# EAGLE board controller (EAGLE 9.6.1)
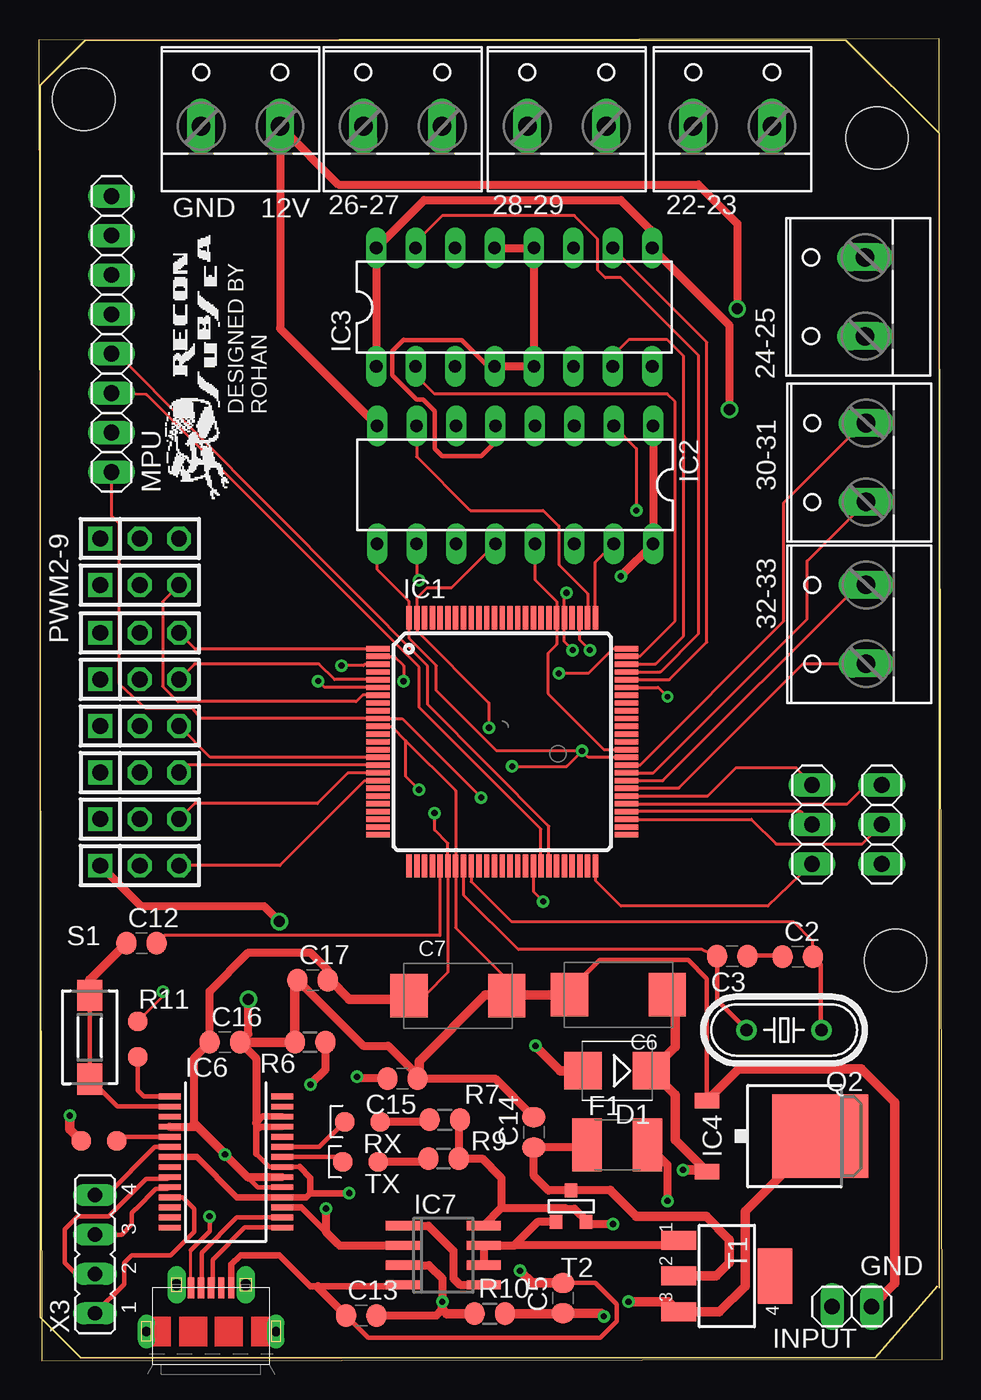
[diagram p0: board, top side]
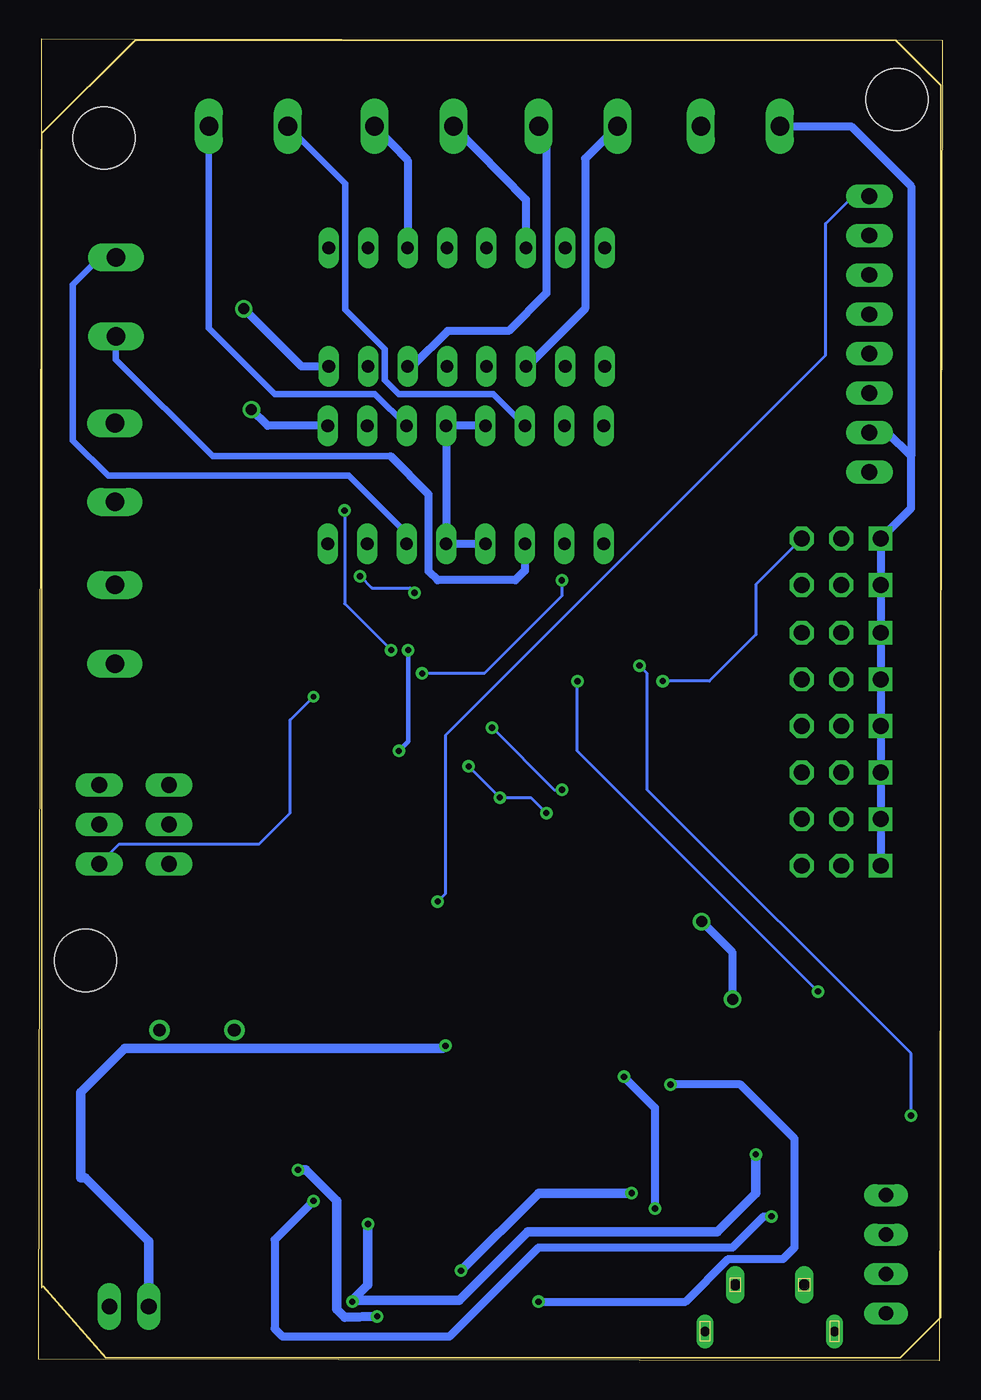
[diagram p1: board, bottom side, seen from below]

Size 58.2 x 85.2 mm. Coordinates in mm from the lower left corner, seen from the top.
Outline: 57.9,4.8 53.9,0.2 2.7,0.2 0.1,2.8 0.1,82.2 3,85.1 52,85.1 58,79.1 58,4.7
Outline: 0.2,0 58.2,0.1 58,85.2 0,85.1 0.2,0
Copper layers (1*16): Top 0.035mm / dielectric 1.5mm / Bottom 0.035mm
Design rules "default": minimum track width 6mil, minimum drill 0.35mm, track to track 6mil, track to pad 6mil, pad to pad 6mil, via to via 6mil, smd to smd 6mil, copper to edge 40mil, drill to drill 6mil, minimum pad ring 10mil, minimum via ring 8mil, stop-mask expansion 4mil, vias tented up to drill 0mil, thermal gap 10mil
Net classes: 0 default: width 0.203 mm, drill 0.406 mm, clearance 0.203 mm; 1 power: width 0.61 mm, drill 0.711 mm, clearance 0.203 mm; 2 gnd: width 0.305 mm, drill 0.711 mm, clearance 0.203 mm; 3 usbvcc: width 0.508 mm, drill 0.711 mm, clearance 0.203 mm
Holes 4 mm at 54,78.8 2.9,81.3 55.2,25.8

## Footprints (pad centres in the part's own frame; a part is rotated, then mirrored left to right if it is on the bottom)
W237-132 = drill 1.194 long: 1 -2.54,-0.635; 2 2.54,-0.635
1X03 = drill 1.016 long: 1 -2.54,0; 2 0,0; 3 2.54,0
C0805RND = smd 1.3 x 1.5: 1 -0.977,0; 2 0.977,0
SMC_D = smd 2.4 x 2.8: + -3.15,0; - 3.15,0
SMB = smd 2.4 x 2.4: A 2.2,0; C -2.2,0
L1812 = smd 1.9 x 3.4: 1 -1.95,0; 2 1.95,0
TQFP100 = smd 1.5 x 0.35: 1 -8,6; 2 -8,5.5; 3 -8,5; 4 -8,4.5; 5 -8,4; 6 -8,3.5; 7 -8,3; 8 -8,2.5; 9 -8,2; 10 -8,1.5; 11 -8,1; 12 -8,0.5; 13 -8,0; 14 -8,-0.5; 15 -8,-1; 16 -8,-1.5; 17 -8,-2; 18 -8,-2.5; 19 -8,-3; 20 -8,-3.5; 21 -8,-4; 22 -8,-4.5; 23 -8,-5; 24 -8,-5.5; 25 -8,-6; 51 8,-6; 52 8,-5.5; 53 8,-5; 54 8,-4.5; 55 8,-4; 56 8,-3.5; 57 8,-3; 58 8,-2.5; 59 8,-2; 60 8,-1.5; 61 8,-1; 62 8,-0.5; 63 8,0; 64 8,0.5; 65 8,1; 66 8,1.5; 67 8,2; 68 8,2.5; 69 8,3; 70 8,3.5; 71 8,4; 72 8,4.5; 73 8,5; 74 8,5.5; 75 8,6 | smd 0.35 x 1.5: 26 -6,-8; 27 -5.5,-8; 28 -5,-8; 29 -4.5,-8; 30 -4,-8; 31 -3.5,-8; 32 -3,-8; 33 -2.5,-8; 34 -2,-8; 35 -1.5,-8; 36 -1,-8; 37 -0.5,-8; 38 0,-8; 39 0.5,-8; 40 1,-8; 41 1.5,-8; 42 2,-8; 43 2.5,-8; 44 3,-8; 45 3.5,-8; 46 4,-8; 47 4.5,-8; 48 5,-8; 49 5.5,-8; 50 6,-8; 76 6,8; 77 5.5,8; 78 5,8; 79 4.5,8; 80 4,8; 81 3.5,8; 82 3,8; 83 2.5,8; 84 2,8; 85 1.5,8; 86 1,8; 87 0.5,8; 88 0,8; 89 -0.5,8; 90 -1,8; 91 -1.5,8; 92 -2,8; 93 -2.5,8; 94 -3,8; 95 -3.5,8; 96 -4,8; 97 -4.5,8; 98 -5,8; 99 -5.5,8; 100 -6,8
DIL16 = drill 0.813 long: 1 -8.89,-3.81; 2 -6.35,-3.81; 3 -3.81,-3.81; 4 -1.27,-3.81; 5 1.27,-3.81; 6 3.81,-3.81; 7 6.35,-3.81; 8 8.89,-3.81; 9 8.89,3.81; 10 6.35,3.81; 11 3.81,3.81; 12 1.27,3.81; 13 -1.27,3.81; 14 -3.81,3.81; 15 -6.35,3.81; 16 -8.89,3.81
DPACK = smd 1 x 1.6: 1 -2.28,-4.8; 3 2.28,-4.8 | smd 5.4 x 6.2: 2 0,2.5
SSOP28 = smd 0.381 x 1.499: 1 -4.225,-3.625; 2 -3.575,-3.625; 3 -2.925,-3.625; 4 -2.275,-3.625; 5 -1.625,-3.625; 6 -0.975,-3.625; 7 -0.325,-3.625; 8 0.325,-3.625; 9 0.975,-3.625; 10 1.625,-3.625; 11 2.275,-3.625; 12 2.925,-3.625; 13 3.575,-3.625; 14 4.225,-3.625; 15 4.225,3.625; 16 3.575,3.625; 17 2.925,3.625; 18 2.275,3.625; 19 1.625,3.625; 20 0.975,3.625; 21 0.325,3.625; 22 -0.325,3.625; 23 -0.975,3.625; 24 -1.625,3.625; 25 -2.275,3.625; 26 -2.925,3.625; 27 -3.575,3.625; 28 -4.225,3.625
SO08 = smd 0.6 x 2.2: 1 -1.905,-2.6; 2 -0.635,-2.6; 3 0.635,-2.6; 4 1.905,-2.6; 5 1.905,2.6; 6 0.635,2.6; 7 -0.635,2.6; 8 -1.905,2.6
1X02 = drill 1.016 long: 1 -1.27,0; 2 1.27,0
1X08 = drill 1.016 long: 1 -8.89,0; 2 -6.35,0; 3 -3.81,0; 4 -1.27,0; 5 1.27,0; 6 3.81,0; 7 6.35,0; 8 8.89,0
1X03' = drill 1.016 square: 1 -2.54,0 | drill 1.016 octagon: 2 0,0; 3 2.54,0
HC49/S = drill 0.813: 1 -2.413,0; 2 2.413,0
R0805RND = smd 1.3 x 1.5: 1 -0.977,0; 2 0.977,0
RCL_0805RND = smd 1.27 x 1.27: P$1 -1.143,0; P$2 1.143,0
0805RND = smd 1.27 x 1.27: P$1 -1.143,0; P$2 1.143,0
DTSM-3 = smd 2 x 1.6: 1 -2.7,0; 2 2.7,0
SOT223 = smd 1.219 x 2.235: 1 -2.311,-3.099; 2 0,-3.099; 3 2.311,-3.099 | smd 3.6 x 2.2: 4 0,3.099
SOT-23 = smd 0.787 x 0.889: 1 0.025,-1.016; 2 -0.94,1.016; 3 0.991,1.016
47589-0001 = smd 1.35 x 0.4: 1 2.8,1.3; 2 2.8,0.65; 3 2.8,0; 4 2.8,-0.65; 5 2.8,-1.3 | drill 0.6 pad 0.95 long: CASING1 0,4.175; CASING2 0,-4.175 | drill 0.7 pad 1.1 long: CASING3 3,2.225; CASING4 3,-2.225
JP4 = drill 0.914 long: 1 -3.81,0; 2 -1.27,0; 3 1.27,0; 4 3.81,0

## Placement (x,y rotation side)
12V  [W237-132]  13,80.2 0 top
22-23  [W237-132]  44.7,80.2 0 top
24-25  [W237-132]  52.6,68.57 90 top
26-27  [W237-132]  23.45,80.2 0 top
28-29  [W237-132]  34.02,80.2 0 top
30-31  [W237-132]  52.67,57.89 90 top
32-33  [W237-132]  52.67,47.46 90 top
34-39  [1X03]  54.31,34.56 90 top
C2  22p  [C0805RND]  48.9,26.03 0 top
C3  22p  [C0805RND]  44.68,26.07 180 top
C5  10u  [C0805RND]  33.77,4.04 90 top
C6  100u  [SMC_D]  37.34,23.58 180 top
C7  10u  [SMC_D]  27,23.52 0 top
C12  100n  [C0805RND]  6.62,26.91 0 top
C13  100n  [C0805RND]  20.77,2.91 0 top
C14  100n  [C0805RND]  31.89,14.72 90 top
C15  100n  [C0805RND]  23.43,18.19 180 top
C16  100n  [C0805RND]  11.99,20.53 0 top
C17  100n  [C0805RND]  17.64,24.53 0 top
D1  [SMB]  37.26,18.69 180 top
F1  500mA  [L1812]  37.28,13.91 0 top
IC1  ATMEGA1280-16AU  [TQFP100]  29.86,39.89 0 top
IC2  L293D  [DIL16]  30.69,56.45 180 top
IC3  L293D  [DIL16]  30.63,67.9 0 top
IC4  MC33269D-5.0  [DPACK]  47.85,14.48 270 top
IC6  FT232RL  [SSOP28]  12.05,12.81 270 top
IC7  LM358D  [SO08]  26.06,6.8 270 top
INPUT  [1X02]  52.38,3.49 0 top
JP2  34-39  [1X03]  49.81,34.56 270 top
MPU  [1X08]  4.69,66.17 90 top
PWM2  [1X03']  6.5,49.99 0 top
PWM2-9  [1X03']  6.5,52.99 0 top
PWM3  [1X03']  6.5,46.91 0 top
PWM4  [1X03']  6.5,43.91 0 top
PWM5  [1X03']  6.5,40.91 0 top
PWM6  [1X03']  6.5,37.91 0 top
PWM7  [1X03']  6.5,34.91 0 top
PWM8  [1X03']  6.5,31.91 0 top
Q2  16MHz  [HC49/S]  48.02,21.31 180 top
R6  10k  [R0805RND]  17.48,20.53 0 top
R7  1k  [R0805RND]  26.16,15.53 0 top
R9  1k  [R0805RND]  26.08,13.03 0 top
R10  10k  [R0805RND]  29.06,3.03 0 top
R11  1K  [RCL_0805RND]  6.39,20.74 90 top
R12  1K  [RCL_0805RND]  3.89,14.16 180 top
RX  [0805RND]  20.85,15.41 180 top
S1  DTSM-3  [DTSM-3]  3.28,20.85 90 top
T1  NDT2955  [SOT223]  44.33,5.46 270 top
T2  FDN340P  [SOT-23]  34.32,9.96 180 top
TX  [0805RND]  20.74,12.83 180 top
U$1  MICRO-USB-RECEPTACLE47589-0001  [47589-0001]  11.1,1.89 90 top
X3  [JP4]  3.62,6.86 90 top

## Library data of the parts
12V 22-23 24-25 26-27 28-29 30-31 32-33 = con-wago-508; OC_FARNELL: unknown; OC_NEWARK: unknown
34-39 INPUT JP2 MPU = pinhead
C2 C3 C5-C7 C12-C17 F1 R6 R7 R9 R10 = rcl
D1 = diode
IC1 = atmel-2005
IC2 IC3 = st-microelectronics; MPN: L293D; OC_FARNELL: 9589619; OC_NEWARK: 56P8249
IC4 IC7 = linear
IC6 R11 R12 = SmartPrj
PWM2 PWM2-9 PWM3-PWM8 = pinhead(1)
Q2 = crystal
RX TX = led
S1 = switch-tact
T1 T2 = zetex
U$1 = con-molex-usb
X3 = jumper

## Nets
50: IC1.50 JP2.3
53: 34-39.2 IC1.53
54: IC1.54 JP2.2
55: 34-39.3 IC1.55
56: IC1.56 JP2.1
57: 32-33.1 IC1.57
58: 32-33.2 IC1.58
59: 30-31.1 IC1.59
60: 30-31.2 IC1.60
70: 34-39.1 IC1.70
71: IC1.71 IC3.10
72: IC1.72 IC3.15
73: IC1.73 IC3.7
74: IC1.74 IC3.2
75: IC1.75 IC2.10
76: IC1.76 IC2.15
77: IC1.77 IC2.7
78: IC1.78 IC2.2
+3V3 [power]: C15.2 IC6.17 IC7.2
+5V [usbvcc]: C7.+ C16.1 C17.2 IC1.10 IC1.31 IC1.61 IC1.80 IC1.100 IC2.1 IC2.9 IC2.16 IC3.1 IC3.9 IC3.16 IC4.2 IC6.4 IC6.19 IC6.20 IC7.8 MPU.1 R7.2 R9.2 T1.3 T2.2
CMP: C13.2 IC7.3 R6.2 R10.1
CTS: IC6.11 X3.1
D+: IC6.15 U$1.3
D-: IC6.16 U$1.2
DCD: IC6.10 X3.3
DSR: IC6.9 X3.2
DTR: C12.1 IC6.2 S1.1 S1.2
GATE_CMD: IC7.6 IC7.7 T1.1 T2.3
GND: 12V.1 C5.2 C6.- C7.- C13.1 C14.2 C15.1 C16.2 C17.1 IC1.11 IC1.32 IC1.62 IC1.81 IC1.99 IC2.4 IC2.5 IC2.12 IC2.13 IC3.4 IC3.5 IC3.12 IC3.13 IC4.1 IC6.7 IC6.18 IC6.21 IC6.25 IC6.26 IC7.4 INPUT.2 MPU.2 PWM2-9.1 PWM2.1 PWM3.1 PWM4.1 PWM5.1 PWM6.1 PWM7.1 PWM8.1 R6.1 U$1.5
GND4 [gnd]: C2.1 C3.1
INT: IC1.42 MPU.8
M1-1: 22-23.2 IC2.3
M1-2: 22-23.1 IC2.6
M2-1: 24-25.2 IC2.14
M2-2: 24-25.1 IC2.11
M3-1: 26-27.1 IC3.3
M3-2: 26-27.2 IC3.6
M4-1: 28-29.1 IC3.14
M4-2: 28-29.2 IC3.11
M8RXD: IC6.1 R11.P$1
M8TXD: IC6.5 R12.P$1
N$1: IC1.6 PWM2-9.3
N$2: IC1.7 PWM2.3
N$3: IC1.1 PWM3.3
N$4: IC1.5 PWM4.3
N$5: IC7.1 IC7.5
N$6: C2.2 IC1.34 Q2.1
N$7: C3.2 IC1.33 Q2.2
N$8 [usbvcc]: F1.2 U$1.1
N$15: IC6.23 RX.P$2
N$53: IC6.22 TX.P$2
N$54: R7.1 RX.P$1
N$55: R9.1 TX.P$1
PE0: IC1.2 R11.P$2
PE1: IC1.3 R12.P$2
PH3: IC1.15 PWM5.3
PH4: IC1.16 PWM6.3
PH5: IC1.17 PWM7.3
PH6: IC1.18 PWM8.3
PWRIN [power]: D1.A INPUT.1
RESET: C12.2 IC1.30
RI: IC6.6 X3.4
SCL: IC1.43 MPU.3
SDA: IC1.44 MPU.4
USBVCC [usbvcc]: C14.1 F1.1 T1.2 T2.1
VCC2: 12V.2 IC2.8 IC3.8
VIN [power]: C5.1 C6.+ D1.C IC4.3 R10.2

## Tracks (layer width: path | path; a pad name or v marks a point on that pad's centre or on a via)
50
  Top 0.203: JP2.3 46.98,29.3 37.5,29.3 35.86,30.94 IC1.50
53
  Top 0.203: IC1.53 45.91,34.89 47.5,33.3 53.05,33.3 34-39.2
54
  Top 0.203: JP2.2 49.09,35.39 IC1.54
55
  Top 0.203: IC1.55 52.09,35.89 53.3,37.1 34-39.3
56
  Top 0.203: IC1.56 43.09,36.39 44.91,38.21 48.81,38.21 JP2.1
57
  Top 0.203: IC1.57 37.88,36.91 41.24,36.91 49.25,44.92 32-33.1
58
  Top 0.203: IC1.58 40.22,37.39 52.83,50 32-33.2
59
  Top 0.203: IC1.59 39.59,37.89 49.5,47.8 49.5,51.54 30-31.1
60
  Top 0.203: IC1.60 37.88,38.41 38.74,38.41 48,47.67 48,55.3 53.13,60.43 30-31.2
70  (via drill 0.35)
  Top 0.203: IC1.70 39.91,43.39 v40.5,42.8
  Bottom 0.203: 34-39.1 53.03,33.3 44,33.3 42,35.3 42,41.3 v40.5,42.8
71
  Top 0.203: IC1.71 40.62,43.89 43.05,46.31 43.05,65.64 IC3.10
72
  Top 0.203: IC1.72 40.01,44.39 40.03,44.37 42.48,46.82 42.48,64.82 37.5,69.8 36.5,69.8 36,70.3 36,72.3 34.5,73.8 26,73.8 24.28,72.08 IC3.15
73
  Top 0.203: IC1.73 37.88,44.91 39.74,44.91 41.55,46.72 41.55,64.75 40.5,65.8 38,65.8 37,64.8 37,64.09 IC3.7
74
  Top 0.203: IC1.74 37.88,45.41 38.74,45.41 41,47.67 41,61.8 40.5,62.3 25.5,62.3 24.28,63.52 IC3.2
75  (via drill 0.4)
  Top 0.203: IC2.10 24.34,50.46 v24.5,50.3 | IC1.75 37.84,45.87 36.98,45.87 35.41,44.3 v33.5,44.3
  Bottom 0.203: v24.5,50.3 24.5,49.3 29.5,44.3 v33.5,44.3
76
  Top 0.203: IC1.76 35.86,51.46 IC2.15
77
  Top 0.203: IC2.7 24.34,58.26 27.8,54.8 32.5,54.8 33.5,53.8 33.5,51.3 35.36,49.44 IC1.77
78  (via drill 0.4)
  Top 0.203: IC2.2 38.5,58.8 v38.5,54.8 | v35.5,45.8 34.86,46.44 IC1.78
  Bottom 0.203: v38.5,54.8 38.5,48.8 v35.5,45.8
+3V3  (via drill 0.4)
  Top 0.406: IC6.17 16.91,9.89 19.25,7.55 19.36,7.43
  Top 0.508: 19.36,7.43 IC7.2 | C15.2 20.61,18.19 v20.5,18.3 | v18.5,9.8 18.5,8.3 19.25,7.55
  Bottom 0.508: v20.5,18.3 18.5,16.3 v18.5,9.8
+5V  (via drill 0.4, 0.41, 0.71)
  Top 0.203: 24.85,23.52 26.36,25.03 IC1.31 26.36,33.34 25.5,34.2 v25.5,35.3 | IC2.9 21.8,51 23.86,48.94 IC1.100 23.86,46.55 25.61,44.8 25.61,43.19 29.5,39.3 31.5,39.3 | v34,49.5 33.86,49.36 IC1.80 33.86,46.34 v34.4,45.8 | MPU.1 4.69,54.43 5.18,53.94 5.18,43.62 6.88,42.05 9.88,42.05 10.43,41.39 IC1.10 23.41,41.39 v28.5,36.3 | IC1.61 35.41,38.89 v35,39.3 | v35,39.3 31.5,39.3 | 31.5,39.3 | v30.5,38.3 34,38.3 v35,39.3
  Top 0.305: 13.5,11.8 14.12,11.19 IC6.19
  Top 0.508: IC6.20 13.54,11.84 13.5,11.8 10.21,15.09 10,15.09 | IC6.4 10,15.09 | 10,15.09 10,15.3 10,19.52 C16.1 11.01,23.81 13.5,26.3 17.5,26.3 18.62,25.18 C17.2 | IC7.8 29.8,9.85 | 29.8,9.85 33.91,9.85 33.96,9.8 34.5,9.8 35.26,9.04 T2.2 | v37,8.8 35.4,8.8 | R7.2 27.06,15.45 R9.2 28.56,13.03 29.8,11.79 29.8,9.85 | 24.85,23.52 C7.+ | IC3.1 IC3.16 24.83,74.8 37.5,74.8 39.52,72.78 IC3.9 44.5,66.73 v44.5,61.3 | IC2.1 IC2.16 v37.5,50.56
  Top 0.61: v38,3.8 40.58,3.8 T1.3 43.85,3.15 45.5,4.8 45.5,9.63 IC4.2 | v12,13.3 10,15.3 | 35.4,8.8 T2.2 | C17.2 18.77,24.53 20,23.3 23.63,23.3 C7.+
  Bottom 0.203: v37.5,50.56 36.74,49.8 34.3,49.8 v34,49.5 | v25.5,35.3 26.5,36.3 v28.5,36.3 v30.5,38.3
  Bottom 0.305: v34.4,45.8 34.4,39.9 v35,39.3
  Bottom 0.508: IC2.1 43.46,60.26 v44.5,61.3
  Bottom 0.61: 38,3.89 31.12,3.89 26.71,8.3 14.5,8.3 12,10.8 v12,13.3 | v38,3.8 38,3.89 | 38,3.89 37,4.89 v37,8.8
CMP  (via drill 0.4)
  Top 0.508: IC7.3 25.14,6.17 26,5.3 v26,3.8 | 26,3.3 25.61,2.91 C13.2 | R6.2 18.46,18.76 v17.5,17.8
  Top 0.61: R10.1 26.27,3.03 26,3.3 v26,3.8
  Bottom 0.508: v26,3.8 16.52,3.8 13.77,6.55 10.24,6.55 9.5,7.3 9.5,14.3 13,17.8 v17.5,17.8
CTS
  Top 0.305: IC6.11 9.27,10.54 10,9.8 10,8.3 8.5,6.8 6,6.8 5.5,6.3 5.5,4.93 X3.1
D+
  Top 0.305: U$1.3 11.19,4.78 11.19,6.51 13.27,8.59 IC6.15
D-
  Top 0.305: U$1.2 10.5,4.74 10.5,6.96 12.77,9.24 IC6.16
DCD
  Top 0.305: IC6.10 8.32,11.08 7.55,11.08 6.27,9.8 6.26,9.8 6,9.54 6,8.8 5.33,8.13 X3.3
DSR
  Top 0.305: IC6.9 8.32,11.73 6.93,11.73 4.5,9.3 2.5,9.3 1.67,8.47 1.67,6.3 2.38,5.59 X3.2
DTR
  Top 0.305: IC6.2 5.04,16.39 S1.1 | S1.2 S1.1 | 2.78,18.65 S1.1
  Top 0.61: C12.1 3.28,24.55 S1.2
GATE_CMD
  Top 0.508: IC7.6 IC7.7 30.64,7.43 | T2.3 32.14,8.94 30.64,7.43 | T1.1 40.9,7.43 30.64,7.43
GND  (via drill 0.4, 0.41, 0.71)
  Top 0.203: C6.- 31.19,23.58 26.86,27.91 IC1.32 26.86,36.75 23.65,39.95 | IC2.13 31.96,50.34 33.38,48.92 33.38,47.91 IC1.81 33.36,46.16 32.79,45.59 32.79,43.01 36.41,39.39 IC1.62 | IC2.12 26.58,49.8 25,49.8 24.36,49.16 IC1.99 24.38,47.87 24.38,47.01 29,42.39 v29,40.8 | IC1.11 21.88,40.87 22.74,40.87 23.65,39.95 | v24.5,36.8 23.65,37.65 23.65,39.95
  Top 0.305: 17.25,10.55 17.23,10.53 | C6.- 34.19,23.88 36.14,25.84 41.84,25.84 43.05,24.62 IC4.1 | C13.1 21.23,1.47 36.17,1.47 37.24,2.54 37.24,3.63 35.86,5.02 C5.2 | IC3.4 28.92,64.09 27.24,65.77 23.53,65.77 23.5,65.8 22.76,65.06 22.76,63.52 24.34,61.94 24.76,61.94 25.5,61.2 25.5,58.8 26,58.3 28.5,58.3 29.42,59.22 IC2.5 | 16.8,12.5 IC6.21 14.83,12.49 14,13.32
  Top 0.406: IC6.26 14.44,15.74 14,15.3 14,14.8 | IC6.25 14.29,15.09 14,14.8 | 16.8,12.5 17.5,11.8 17.5,10.8 | 17.5,10.8 17.25,10.55 17.23,10.54 IC6.18 12.77,10.54 10.16,13.14 IC6.7 | 14,13.32 14,14.8 | U$1.5 12.4,6.2 13,6.8 15.5,6.8 17.5,4.8 18,4.8 23.36,4.8 IC7.4 | v20,10.8 17.5,10.8
  Top 0.508: 14,15.3 14,19.5 C16.2 13.5,21.06 v13.5,23.3 | C13.1 18,4.7 18,4.8 | C15.1 29.4,18.19 C14.2 | IC3.13 IC3.12 IC3.5 IC3.4 | C17.1 20.89,20.3 22.5,20.3 24.5,18.3 24.5,18.28 | PWM8.1 6.57,29.3 14.5,29.3 v15.5,28.3
  Top 0.61: C5.2 31.78,5.02 v31,5.8 | C6.- 30.21,23.58 | 30.21,23.58 C7.- | C15.1 24.5,18.28 24.5,19.3 28.78,23.58 30.21,23.58 | C16.2 R6.1 16.5,24.37 C17.1 | INPUT.2 55.15,4.99 55.15,16.65 53,18.8 45.09,18.8 IC4.1
  Bottom 0.203: v29,40.8 25,36.8 v24.5,36.8
  Bottom 0.508: 2,58.3 2,54.95 PWM2-9.1 PWM2.1 PWM3.1 PWM4.1 PWM5.1 PWM6.1 PWM7.1 PWM8.1 | 2,58.3 3.52,59.82 MPU.2 | 12V.1 5.87,79.56 2,75.7 2,58.3 | IC2.5 IC2.4 IC2.13 IC2.12 | v13.5,23.3 13.5,26.3 v15.5,28.3
  Bottom 0.61: v31,5.8 26,10.8 v20,10.8
GND4
  Top 0.305: 47.65,26.3 47.83,26.13 | 47.83,26.13 C2.1 | C3.1 45.71,26.13 47.83,26.13
INT  (via drill 0.4)
  Top 0.203: IC1.42 31.86,30.24 v32.5,29.6
  Bottom 0.203: v32.5,29.6 32,30.1 32,40.3 7.5,64.8 7.5,73.3 5.74,75.06 MPU.8
M1-1
  Bottom 0.406: IC2.3 36.54,62.3 43,62.3 47.24,66.54 22-23.2
M1-2
  Bottom 0.406: IC2.6 28.92,62.3 35,62.3 35.91,63.21 35.91,65.19 38.45,67.73 38.45,75.86 22-23.1
M2-1
  Bottom 0.406: IC2.14 34.5,53.3 38.23,57.03 53.73,57.03 56,59.3 56,69.34 54.23,71.11 24-25.2
M2-2
  Bottom 0.406: 24-25.1 53.23,64.53 47.01,58.3 35.54,58.3
  Bottom 0.508: 35.54,58.3 33.08,55.84 33.08,50.88 32.5,50.3 27.5,50.3 26.88,50.92 IC2.11
M3-1
  Bottom 0.508: 26-27.1 23,77.47 23,67.8 26.71,64.09 IC3.3
M3-2
  Bottom 0.508: 26-27.2 25.5,79.08 25.5,68.8 27.93,66.37 31.86,66.37 34.14,64.09 IC3.6
M4-1
  Bottom 0.508: 28-29.1 26.82,74.83 IC3.14
M4-2
  Bottom 0.508: 28-29.2 34.44,77.38 IC3.11
M8RXD
  Top 0.305: IC6.1 6.76,17.04 6.39,17.41 R11.P$1
M8TXD
  Top 0.305: IC6.5 5.31,14.44 R12.P$1
N$1  (via drill 0.4)
  Top 0.203: IC1.6 18.41,43.39 v18,43.8
  Bottom 0.203: PWM2-9.3 12,50.03 12,46.8 15,43.8 v18,43.8
N$2
  Top 0.203: PWM2.3 7.97,48.92 7.97,43.47 8.96,42.48 20.45,42.48 20.86,42.89 IC1.7
N$3
  Top 0.203: PWM3.3 10.06,45.89 IC1.1
N$4
  Top 0.203: IC1.5 19.06,43.89 18.04,44.91 10.04,44.91 PWM4.3
N$5
  Top 0.508: IC7.1 25.09,8.71 26.71,7.09 26.71,5.3 27.12,4.89 IC7.5
N$6
  Top 0.203: IC1.34 27.86,30.89 30.45,28.3 48.61,28.3 49.88,27.03 C2.2
  Top 0.305: C2.2 50.38,25.53 50.38,21.53 50.6,21.31 Q2.1
N$7
  Top 0.203: IC1.33 27.36,30.03 30.89,26.5 42.73,26.5 C3.2
  Top 0.305: C3.2 43.7,23.21 Q2.2
N$8  (via drill 0.4)
  Top 0.203: U$1.1 9.8,7.13
  Top 0.305: v11,9.3 11,8.33 9.8,7.13
  Top 0.508: F1.2 40.5,12.64 v40.5,10.3
  Bottom 0.508: v40.5,10.3 43,7.8 43,2.07 42.5,1.57 31.73,1.57 26,7.3 13.5,7.3 11.5,9.3 v11,9.3
N$15
  Top 0.305: IC6.23 18.08,13.79 RX.P$2
N$53
  Top 0.305: IC6.22 19.29,13.14 TX.P$2
N$54
  Top 0.508: R7.1 25.06,15.41 RX.P$1
N$55
  Top 0.508: R9.1 24.9,12.83 TX.P$1
PE0  (via drill 0.4, 0.41)
  Top 0.203: R11.P$2 8,23.49 v8,23.8 | IC1.2 22.9,45.39 23.5,44.8 v23.5,43.8
  Bottom 0.203: v8,23.8 23.5,39.3 v23.5,43.8
PE1  (via drill 0.4)
  Top 0.203: IC1.3 21.84,44.87 20.98,44.87 20.91,44.8 v19.5,44.8
  Top 0.61: R12.P$2 2,14.91 v2,15.8
  Bottom 0.203: v2,15.8 2,19.8 19,36.8 19,44.3 v19.5,44.8
PH3
  Top 0.203: IC1.15 11.06,38.89 PWM5.3
PH4
  Top 0.203: IC1.16 9.52,38.39 PWM6.3
PH5
  Top 0.203: IC1.17 21.84,37.87 19.91,37.87 17.95,35.91 10.04,35.91 PWM7.3
PH6
  Top 0.203: IC1.18 21.84,37.37 20.98,37.37 15.52,31.91 PWM8.3
PWRIN  (via drill 0.4)
  Top 0.61: D1.A 33.61,18.69 v32,20.3
  Bottom 0.61: INPUT.1 51.11,7.69 55.22,11.8 55.5,11.8 55.5,17.3 52.66,20.14 32.16,20.14 v32,20.3
RESET
  Top 0.203: C12.2 8.1,27.41 25.86,27.41 IC1.30
RI
  Top 0.305: IC6.6 7.49,13.79 4.37,10.67 X3.4
SCL
  Top 0.203: IC1.43 32.34,31.91 32.34,34.27 24.5,42.11 24.5,44.7 6.94,62.26 MPU.3
SDA
  Top 0.203: IC1.44 32.86,34.44 25.05,42.3 25.05,44.77 4.9,65.06 MPU.4
USBVCC
  Top 0.508: 36.82,10.98 T2.1 32.82,10.98 31.89,11.91 C14.1 35.16,13.74 F1.1
  Top 0.61: T1.2 43.66,5.46 44.5,6.3 44.5,7.8 43,9.3 38.5,9.3 36.82,10.98
VCC2  (via drill 0.71)
  Top 0.508: IC2.8 15.54,66.52 12V.2 19.3,75.8 42.5,75.8 45,73.3 v45,67.8
  Bottom 0.508: v45,67.8 41.29,64.09 IC3.8
VIN  (via drill 0.4)
  Top 0.61: R10.2 33.74,3.03 C5.1 36.24,3.06 v36.4,2.86 | v41.5,12.3 42.95,12.3 IC4.3 41,14.25 41,17.15 D1.C 41,20.23 41,23.07 C6.+
  Bottom 0.61: v36.4,2.86 38.5,2.8 39,3.3 39,10.3 41,12.3 v41.5,12.3

## Text on the board
tPlace: GND | DESIGNED BY | ROHAN | GND